# EAGLE board Board-finale (EAGLE 6.2)
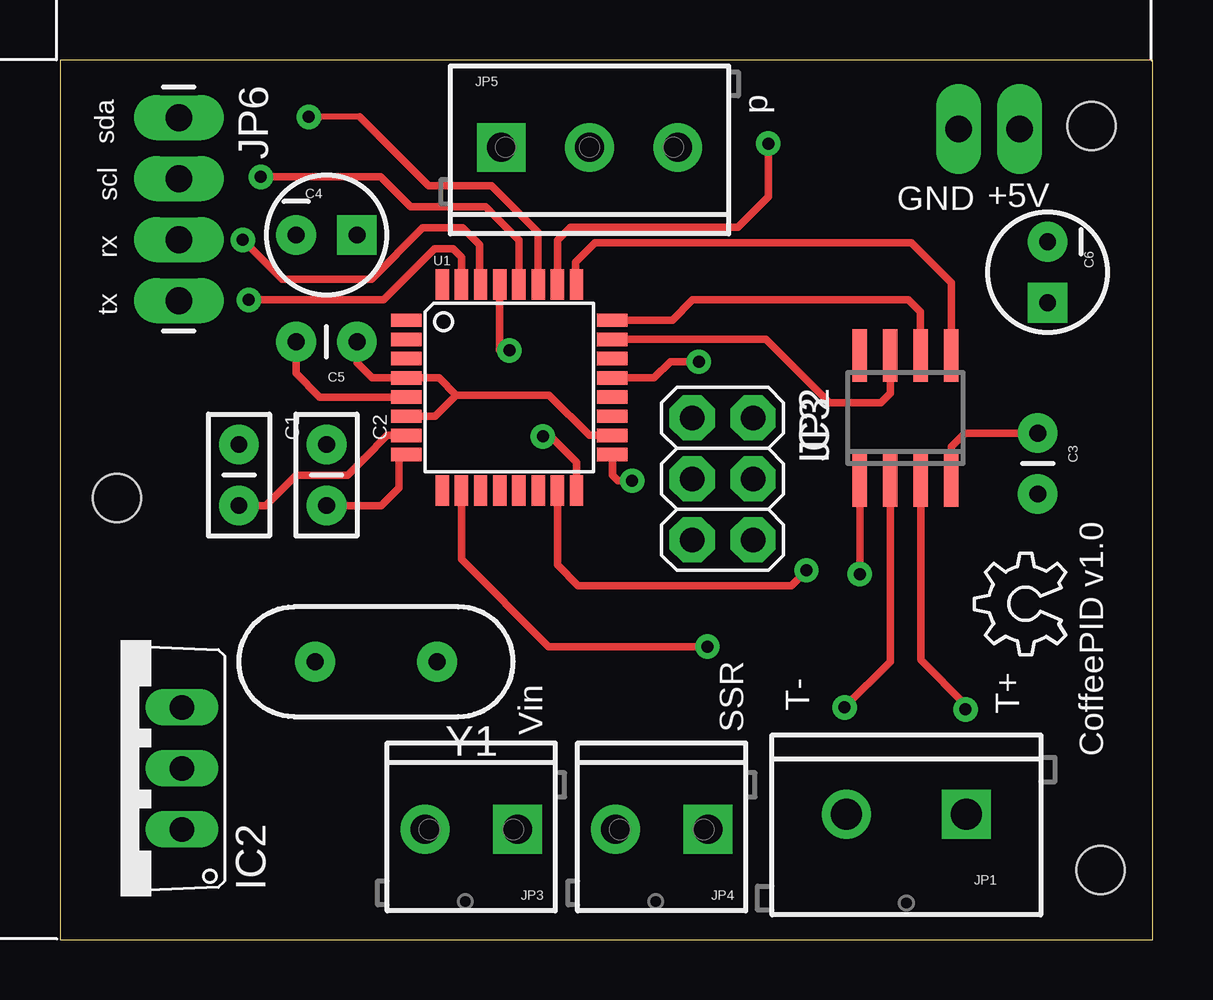
[diagram p0: board, top side]
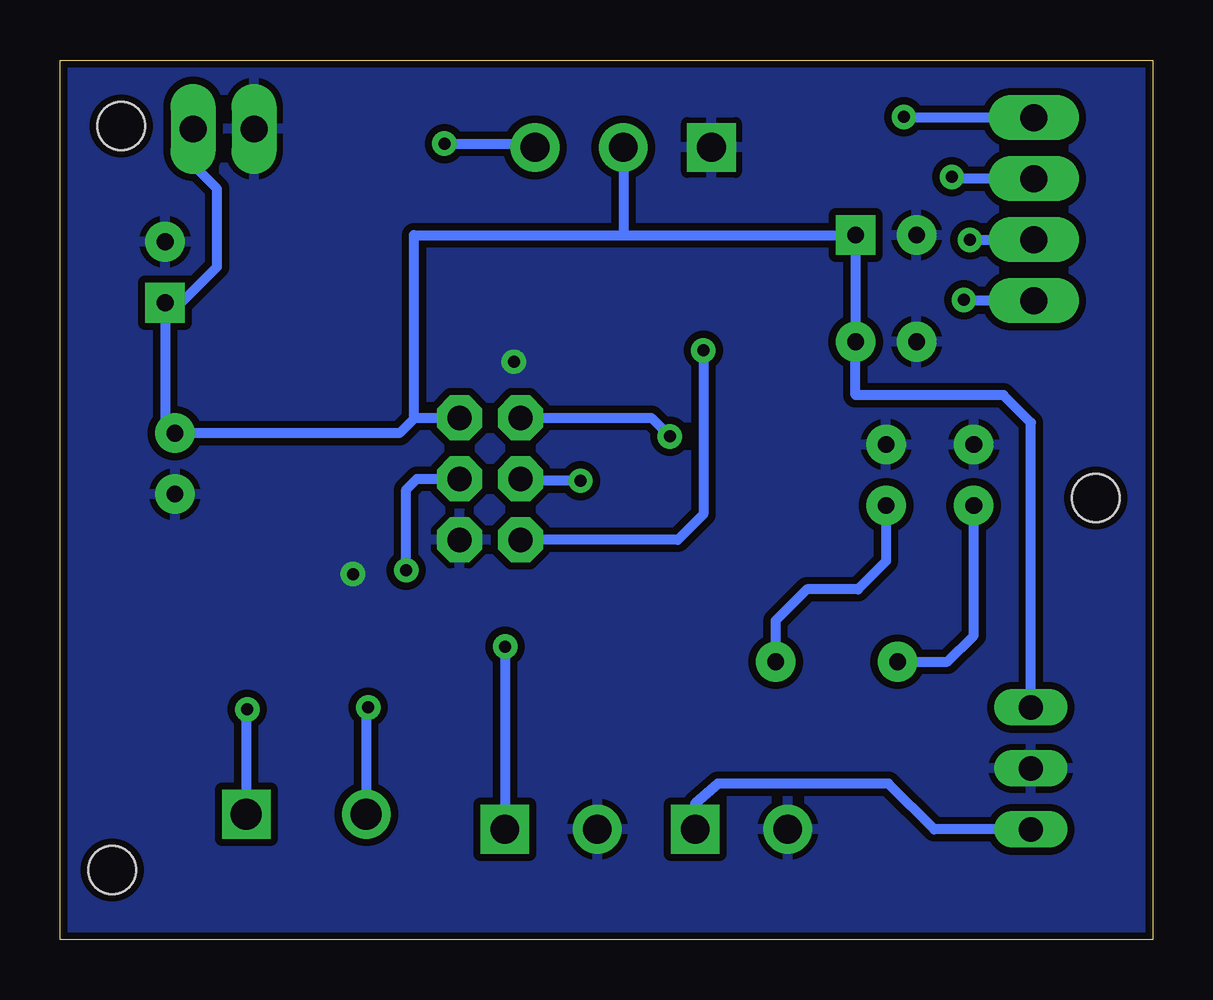
[diagram p1: board, bottom side, seen from below]

Size 45.55 x 36.66 mm. Coordinates in mm from the lower left corner, seen from the top.
Outline: 0,0 45.55,0 45.55,36.66 0,36.66 0,0
Copper layers (1*16): Top 0.035mm / dielectric 1.5mm / Bottom 0.035mm
Design rules: minimum track width 6mil, minimum drill 12mil, track to track 6mil, track to pad 6mil, pad to pad 6mil, via to via 6mil, smd to smd 0mil, copper to edge 10mil, drill to drill 10mil, minimum pad ring 10mil, minimum via ring 6mil, stop-mask expansion 2mil, vias tented up to drill 100mil, thermal gap 10mil
Holes 2 mm at 43,33.91 43.37,2.91 2.37,18.41

## Footprints (pad centres in the part's own frame; a part is rotated, then mirrored left to right if it is on the bottom)
CAP-PTH-SMALL2 = drill 0.7 pad 1.651: 1 0,0; 2 2.54,0
CAP-PTH-SMALL = drill 0.7 pad 1.651: 1 0,0; 2 2.54,0
CPOL-RADIAL-10UF-25V = drill 0.7 pad 1.651 square: 1 1.27,0 | drill 0.7 pad 1.651: 2 -1.27,0
TO220V = drill 1.016 long: 1 -2.54,-2.54; 2 0,-2.54; 3 2.54,-2.54
SO08-MAX6675 = smd 0.6 x 2.2: 1 -1.905,-2.6; 2 -0.635,-2.6; 3 0.635,-2.6; 4 1.905,-2.6; 5 1.905,2.6; 6 0.635,2.6; 7 -0.635,2.6; 8 -1.905,2.6
SCREWTERMINAL-5MM-2 = drill 1.3 pad 2.032 square: 1 0,0 | drill 1.3 pad 2.032: 2 5,0
2X03 = drill 1.016 pad 1.88 octagon: 1 -2.54,-1.27; 2 -2.54,1.27; 3 0,-1.27; 4 0,1.27; 5 2.54,-1.27; 6 2.54,1.27
SCREWTERMINAL-3.5MM-2_LOCK = drill 1.2 pad 2.032 square: 1 -0.178,0 | drill 1.2 pad 2.032: 2 3.678,0
SCREWTERMINAL-3.5MM-3_LOCK.007S = drill 1.2 pad 2.032 square: 1 -0.178,0 | drill 1.2 pad 2.032: 2 3.5,0; 3 7.178,0
1X04_LONGPADS = drill 1.118 pad 1.88 long: 1 0,0; 2 2.54,0; 3 5.08,0; 4 7.62,0
1X02_LONGPADS = drill 1.118 pad 1.88 long: 1 0,0; 2 2.54,0
TQFP32-08 = smd 1.27 x 0.559: 1 -4.293,2.8; 2 -4.293,2; 3 -4.293,1.2; 4 -4.293,0.4; 5 -4.293,-0.4; 6 -4.293,-1.2; 7 -4.293,-2; 8 -4.293,-2.8; 17 4.293,-2.8; 18 4.293,-2; 19 4.293,-1.2; 20 4.293,-0.4; 21 4.293,0.4; 22 4.293,1.2; 23 4.293,2; 24 4.293,2.8 | smd 0.559 x 1.27: 9 -2.8,-4.293; 10 -2,-4.293; 11 -1.2,-4.293; 12 -0.4,-4.293; 13 0.4,-4.293; 14 1.2,-4.293; 15 2,-4.293; 16 2.8,-4.293; 25 2.8,4.293; 26 2,4.293; 27 1.2,4.293; 28 0.4,4.293; 29 -0.4,4.293; 30 -1.2,4.293; 31 -2,4.293; 32 -2.8,4.293
HC49US = drill 0.7 pad 1.651: 1 -2.54,0; 2 2.54,0

## Placement (x,y rotation side)
C1  [CAP-PTH-SMALL2]  7.46,20.64 270 top
C2  [CAP-PTH-SMALL2]  11.11,20.64 270 top
C3  [CAP-PTH-SMALL]  40.76,21.11 270 top
C4  [CPOL-RADIAL-10UF-25V]  11.11,29.37 0 top
C5  [CAP-PTH-SMALL]  12.38,24.92 180 top
C6  [CPOL-RADIAL-10UF-25V]  41.17,27.82 270 top
IC2  7805TV  [TO220V]  2.54,7.14 90 top
IC3  MAX6675  [SO08-MAX6675]  35.24,21.75 0 top
JP1  [SCREWTERMINAL-5MM-2]  37.78,5.24 180 top
JP2  [2X03]  27.62,19.21 270 top
JP3  [SCREWTERMINAL-3.5MM-2_LOCK]  18.89,4.6 180 top
JP4  [SCREWTERMINAL-3.5MM-2_LOCK]  26.83,4.6 180 top
JP5  [SCREWTERMINAL-3.5MM-3_LOCK.007S]  18.57,33.02 0 top
JP6  [1X04_LONGPADS]  4.95,34.26 270 top
JP7  [1X02_LONGPADS]  40,33.79 180 top
LOGO1  OSHW_LOGO_6MILX0150-NT  [OSHW_6X150_NOTEXT]  41.93,11.87 90 top
U1  ATMEGA168  [TQFP32-08]  18.73,23.02 0 top
Y1  [HC49US]  13.18,11.59 180 top

## Library data of the parts
C1-C6 IC3 JP1-JP7 U1 Y1 = SparkFun
IC2 = linear
LOGO1 = ohw-logo

## Nets
GND: C1.1 C2.1 C3.2 C4.2 C5.2 C6.2 IC2.2 IC3.1 JP2.6 JP3.2 JP4.2 JP5.1 JP7.2 U1.5 U1.21
MISO: JP2.1 U1.16
MOSI: JP2.4 U1.15
N$1: IC3.3 JP1.1
N$2: C1.2 U1.7 Y1.2
N$3: C2.2 U1.8 Y1.1
N$4: IC3.2 JP1.2
N$5: JP6.1 U1.27
N$6: IC3.5 U1.25
N$7: IC3.6 U1.24
N$8: IC3.7 U1.23
N$9: JP4.1 U1.10
N$10: JP6.2 U1.28
N$11: JP6.3 U1.30
N$12: JP6.4 U1.31
PRESSURE: JP5.3 U1.26
RESET: JP2.5 U1.29
SCK: JP2.3 U1.17
V+: IC2.1 JP3.1
VCC: C3.1 C4.1 C5.1 C6.1 IC2.3 IC3.4 JP2.2 JP5.2 JP7.1 U1.4 U1.6 U1.18

## Tracks (layer width: path | path; a pad name or v marks a point on that pad's centre or on a via)
GND  (via drill 0.5 pad 1.02)
  Top 0.305: U1.5 10.83,22.62 9.84,23.6 C5.2 | IC3.1 v33.34,15.24 | U1.21 24.77,23.42 25.44,24.09 v26.63,24.09
  Bottom 0.406: v33.34,15.24 33.34,15.4
  pour Bottom (isolate 0.305): -0.14,36.67 45.49,36.58 45.53,0.09 -0.08,0.12
MISO  (via drill 0.5 pad 1.02)
  Top 0.305: U1.16 21.53,19.9 20.45,20.98 v20.13,20.98
  Bottom 0.406: JP2.1 20.9,21.75 20.25,21.1 v20.13,20.98
MOSI  (via drill 0.5 pad 1.02)
  Top 0.305: U1.15 20.73,15.62 21.59,14.76 30.48,14.76 v31.11,15.4
  Bottom 0.406: v31.11,15.4 31.11,18.76 30.67,19.21 JP2.4
N$1  (via drill 0.5 pad 1.02)
  Top 0.305: v37.74,9.6 37.74,9.8 35.88,11.67 IC3.3
  Top 0.406: IC3.3 35.96,19.15
  Bottom 0.406: v37.74,9.6 37.78,9.6 JP1.1
N$2
  Top 0.305: U1.7 13.64,21.02 12.7,20.07 11.99,19.37 9.84,19.37 8.57,18.1 C1.2
  Bottom 0.406: Y1.2 8.55,11.59 7.46,12.68 C1.2
N$3
  Top 0.305: 14.13,20.22 14.13,18.84 13.39,18.1 C2.2
  Top 0.406: U1.8 14.13,20.22
  Bottom 0.406: C2.2 11.11,15.78 12.28,14.6 14.41,14.6 15.72,13.3 Y1.1
N$4  (via drill 0.5 pad 1.02)
  Top 0.305: IC3.2 34.61,11.59 v32.7,9.68
  Bottom 0.406: v32.7,9.68 32.78,9.68 JP1.2
N$5  (via drill 0.5 pad 1.02)
  Top 0.254: 12.5,34.29 v10.37,34.29
  Top 0.305: 12.5,34.29 15.37,31.41 18,31.41 19.93,29.48 U1.27
  Top 0.406: v10.37,34.29 10.75,34.29
  Bottom 0.406: JP6.1 10.34,34.26 v10.37,34.29
N$6
  Top 0.305: U1.25 21.5,27.35 21.5,28.24 22.3,29.04 35.5,29.04 37.15,27.39 IC3.5
N$7
  Top 0.305: IC3.6 35.87,26.16 35.37,26.66 26.37,26.66 25.53,25.82 U1.24
N$8
  Top 0.305: U1.23 29.43,25.02 32.07,22.38 34.21,22.38 34.61,22.78 IC3.7
N$9  (via drill 0.5 pad 1.02)
  Top 0.305: U1.10 16.73,15.86 20.37,12.22 v26.99,12.22
  Top 0.406: U1.10 16.67,18.73
  Bottom 0.406: v26.99,12.22 26.99,4.62 JP4.1
N$10  (via drill 0.5 pad 1.02)
  Top 0.305: U1.28 19.13,29.15 17.75,30.54 14.62,30.54 13.37,31.79 v8.37,31.79
  Bottom 0.406: JP6.2 8.3,31.72 v8.37,31.79
N$11  (via drill 0.5 pad 1.02)
  Top 0.305: v7.62,29.16 9.26,27.52 12.98,27.52 15.12,29.66 16.79,29.66 17.5,28.96 17.5,27.35
  Top 0.406: 17.5,27.35 U1.30
  Bottom 0.406: v7.62,29.16 4.33,29.16 JP6.3
N$12  (via drill 0.5 pad 1.02)
  Top 0.305: U1.31 16.73,28.45 16.39,28.79 15.62,28.79 13.5,26.66 v7.87,26.66
  Bottom 0.406: JP6.4 7.85,26.64 v7.87,26.66
PRESSURE  (via drill 0.5 pad 1.02)
  Top 0.305: U1.26 20.73,29.15 21.27,29.69 28.26,29.69 29.53,30.96 v29.53,33.18
  Bottom 0.406: 25.56,33.02 JP5.3 25.91,33.18 v29.53,33.18
RESET  (via drill 0.5 pad 1.02)
  Top 0.305: v18.73,24.56 18.33,24.56 U1.29
  Bottom 0.406: v18.73,24.56 18.73,17.73 19.8,16.67 JP2.5
SCK  (via drill 0.5 pad 1.02)
  Top 0.305: U1.17 23.03,19.36 23.26,19.13 v23.85,19.13
  Bottom 0.406: v23.85,19.13 26.27,19.13 JP2.3
V+
  Bottom 0.406: IC2.1 9.1,4.6 11.01,6.51 18.12,6.51 19.07,5.69 JP3.1
VCC
  Top 0.305: C5.1 12.38,24.04 13,23.42 U1.4 15.79,23.42 16.51,22.7 | IC3.4 37.15,20.54 37.72,21.11 C3.1 | U1.6 15.63,21.82 16.51,22.7 | U1.18 22.07,21.02 20.38,22.7 16.51,22.7
  Bottom 0.406: 30.8,21.75 JP2.2 | 22.07,29.37 30.8,29.37 30.8,21.75 | 22.07,29.37 C4.1 C5.1 12.38,22.7 6.22,22.7 5.08,21.56 IC2.3 | JP5.2 22.07,29.37 | 30.8,21.75 30.8,21.71 31.39,21.11 C3.1 41.17,21.53 C6.1 40.49,26.55 39,28.04 39,31.29 40.12,32.41 40.12,33.79 JP7.1

## Text on the board
tPlace: GND | +5V
tNames: p | sda | scl | rx | tx | T- | T+ | Vin | SSR | CoffeePID v1.0